# Altium PCB Sensor_Glove-X01.PcbDoc (part 2 of 4)
Units mm, origin at the board's own origin, x right, y up, seen from the top; angles counter-clockwise.
Board outline 58.67 x 37.59 mm, 2 copper layers (Top Layer, Bottom Layer), stack 1.711 mm thick; 126 components, 71 nets, 384 pads, 113 vias.
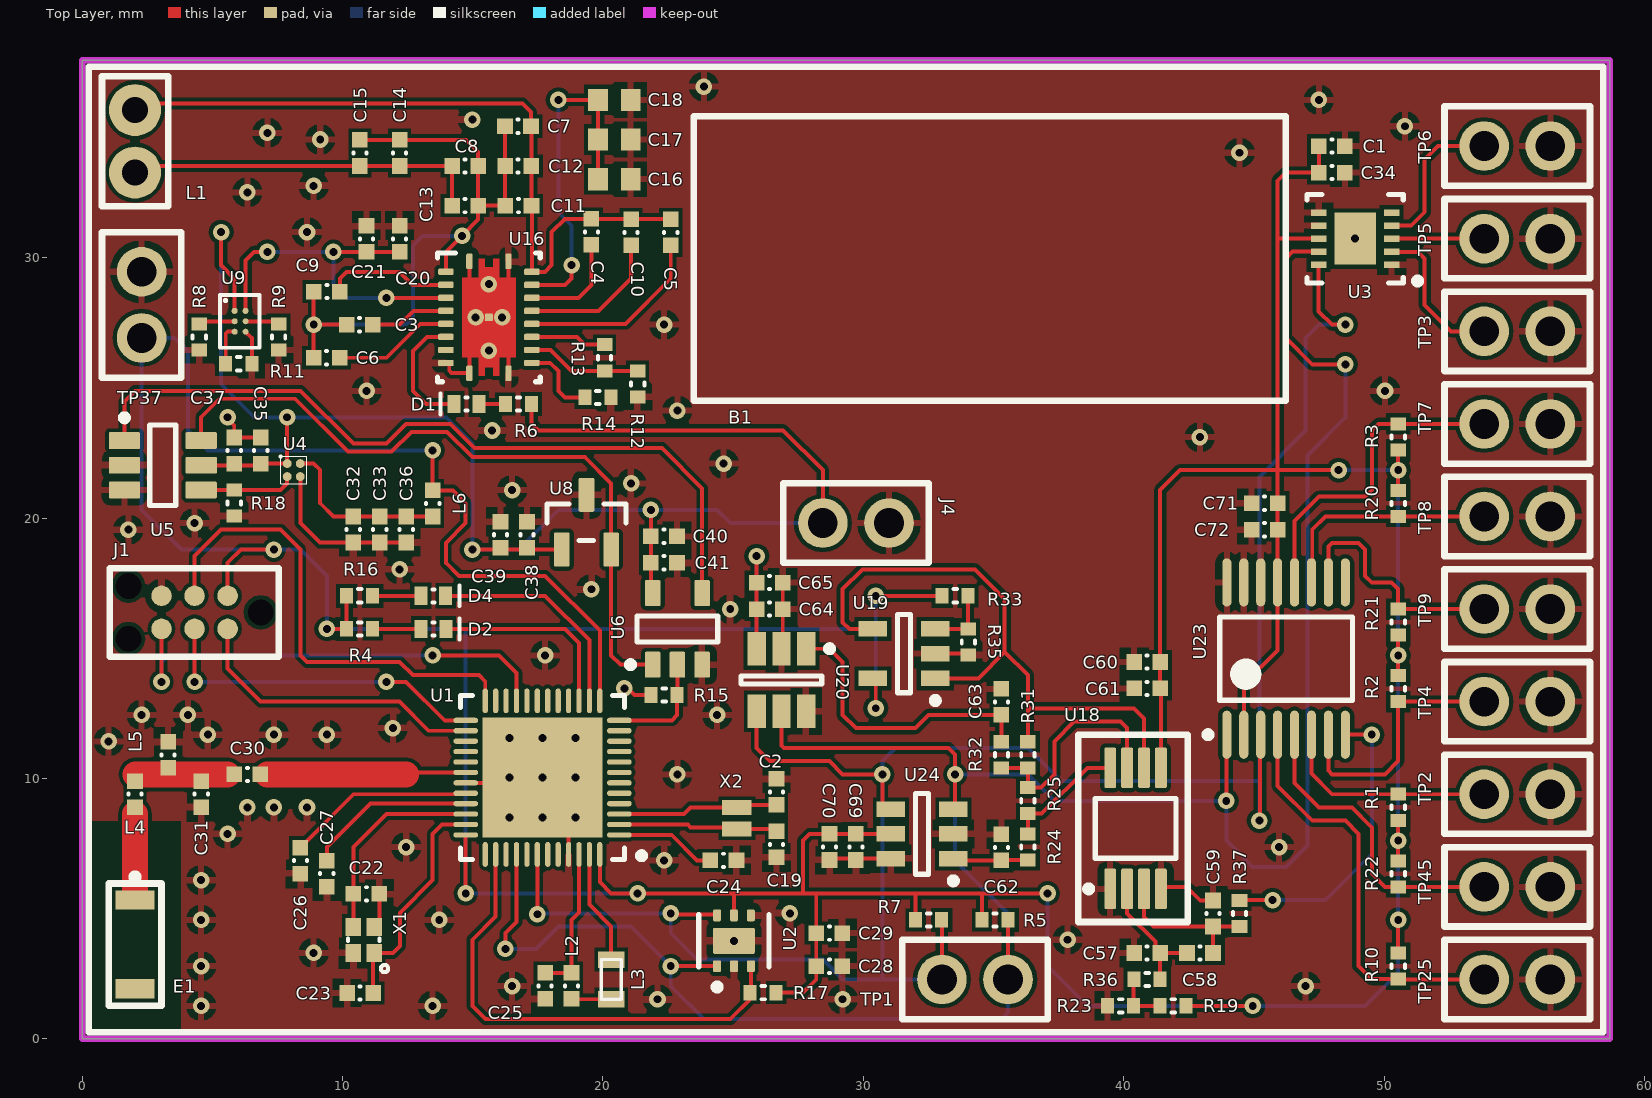
[diagram p0: Top Layer view]

## Part data (continued)
C26 C27: library part C-0402(1005), "Ceramic Capacitor, Multilayer, Ceramic, 50V, 1% +Tol, 1% -Tol, C0G, 30ppm/Cel TC, 0.0001uF, Surface Mount, 0402", Case Code (Imperial)=0402, Case Code (Metric)=1005, Dielectric=C0G, Manufacturer=Yageo, Manufacturer Part Number=CC0402FRNPO9BN101, Max Operating Temperature=125°C, Min Operating Temperature=-55°C, Package Quantity=10000, Supplier Part Number 1=311-3329-1-ND, Tolerance=1%, Voltage Rating=50V, Capacitance=100pF, Case/Package=0402, Category="Ceramic Capacitors", ComponentLink1Description=https://datasheet.ciiva.com/169/product-169683.pdf, ComponentLink1URL=https://datasheet.ciiva.com/169/product-169683.pdf, ComponentLink2Description=https://datasheet.ciiva.com:443/pdfs/VipMasterIC/IC/YAGO/YAGO-S-A0009251638/YAGO-S-A0009251638-1.pdf?src-supplier=IHS+Markit, ComponentLink2URL=https://datasheet.ciiva.com:443/pdfs/VipMasterIC/IC/YAGO/YAGO-S-A0009251638/YAGO-S-A0009251638-1.pdf?src-supplier=IHS+Markit, ComponentLink3Description=http://www.mouser.com/ds/2/447/Yageo_UPY-GP_NP0_16V-to-50V_9-358835.pdf?src-supplier=Mouser, ComponentLink3URL=http://www.mouser.com/ds/2/447/Yageo_UPY-GP_NP0_16V-to-50V_9-358835.pdf?src-supplier=Mouser, ComponentLink4Description=http://components.arrow.com/part/dataview/0323_00775990?src-supplier=Arrow+Europe, ComponentLink4URL=http://components.arrow.com/part/dataview/0323_00775990?src-supplier=Arrow+Europe, ComponentLink5Description=http://www.yageo.com/NewPortal/yageodocoutput?fileName=/pdf/MLCC/UPY-GP_NP0_16V-to-50V_14.pdf&src-supplier=Digi-Key, ComponentLink5URL=http://www.yageo.com/NewPortal/yageodocoutput?fileName=/pdf/MLCC/UPY-GP_NP0_16V-to-50V_14.pdf&src-supplier=Digi-Key, ComponentLink6Description=http://www.yageo.com/documents/recent/UPY-GP_NP0_16V-to-50V_16.pdf?src-supplier=Digi-Key, ComponentLink6URL=http://www.yageo.com/documents/recent/UPY-GP_NP0_16V-to-50V_16.pdf?src-supplier=Digi-Key, ComponentLink7Description=http://www.yageo.com/documents/recent/UPY-GP_NP0_16V-to-50V_9.pdf?src-supplier=Future+Electronics, ComponentLink7URL=http://www.yageo.com/documents/recent/UPY-GP_NP0_16V-to-50V_9.pdf?src-supplier=Future+Electronics, Composition=Ceramic, Depth=0.5mm, Lead Free="Lead Free", Length=1mm, Mount="Surface Mount", Packaging="Tape and Reel", Pricing 1="1=0.11000, 10=0.08200, 100=0.03840, 500=0.02690, 1000=0.02228, 2500=0.02073, 5000=0.01897 (USD)", RoHS=Yes, Stock 1=22812, Supplier 1=Digi-Key, Termination=SMD/SMT, Thickness=0.022inch, Voltage Rating (DC)=50V, Width=0.02inch
C29 C34 C58 C61 C62 C65 C70 C72: library part C-0402(1005), "Ceramic Capacitor, Multilayer, Ceramic, 25V, 10% +Tol, 10% -Tol, X5R, 15% TC, 0.1uF, Surface Mount, 0402", Case Code (Imperial)=0402, Case Code (Metric)=1005, Dielectric=X5R, Manufacturer="Taiyo Yuden", Manufacturer Part Number=TMK105BJ104KV-F, Max Operating Temperature=85°C, Min Operating Temperature=-55°C, Package Quantity=1, Resistor Type=Ceramic, Supplier Part Number 1=587-1456-1-ND, Tolerance=10%, Voltage=25V, Capacitance=100nF, Case/Package=0402, Category="Ceramic Capacitors", ComponentLink1Description=https://datasheet.ciiva.com/169/product-169683.pdf, ComponentLink1URL=https://datasheet.ciiva.com/169/product-169683.pdf, ComponentLink2Description=https://datasheet.ciiva.com:443/pdfs/VipMasterIC/IC/TAIY/TAIY-S-A0009103435/TAIY-S-A0009103038-1.pdf?src-supplier=IHS+Markit, ComponentLink2URL=https://datasheet.ciiva.com:443/pdfs/VipMasterIC/IC/TAIY/TAIY-S-A0009103435/TAIY-S-A0009103038-1.pdf?src-supplier=IHS+Markit, ComponentLink3Description=https://datasheet.ciiva.com/30051/25tmk105bj104kv-f-30051094.pdf?src-supplier=Onlinecomponents.com, ComponentLink3URL=https://datasheet.ciiva.com/30051/25tmk105bj104kv-f-30051094.pdf?src-supplier=Onlinecomponents.com, ComponentLink4Description=https://datasheet.ciiva.com/15922/28tmk105bj104kv-f-15922315.pdf?src-supplier=Onlinecomponents.com, ComponentLink4URL=https://datasheet.ciiva.com/15922/28tmk105bj104kv-f-15922315.pdf?src-supplier=Onlinecomponents.com, ComponentLink5Description=https://datasheet.ciiva.com/131/tmk105bj104kv-f-ss-131420.pdf?src-supplier=Digi-Key, ComponentLink5URL=https://datasheet.ciiva.com/131/tmk105bj104kv-f-ss-131420.pdf?src-supplier=Digi-Key, ComponentLink6Description=https://datasheet.ciiva.com/22768/1693457-22768649.pdf?src-supplier=Farnell, ComponentLink6URL=https://datasheet.ciiva.com/22768/1693457-22768649.pdf?src-supplier=Farnell, Depth=0.5mm, Halogen Free="Halogen Free", Height=0.5mm, Lead Free="Lead Free", Length=1mm, Mount="Surface Mount", Number of Pins=2, Packaging="Tape and Reel", REACH SVHC="No SVHC", RoHS=Yes, Supplier 1=Digi-Key, Termination=SMD/SMT, Thickness=0.022inch, Voltage Rating=25V, Voltage Rating (DC)=25V, Weight=2.3E-05oz, Width=0.5mm
  C29: Pricing 1="1=0.10000, 10=0.04000, 50=0.02180, 100=0.01780, 500=0.01270, 1000=0.00998, 2500=0.00908, 5000=0.00835 (USD)", Stock 1=21430567
  C34 C58 C61 C62 C65 C70 C72: Pricing 1="1=0.10000, 10=0.04400, 50=0.02400, 100=0.01960, 500=0.01398, 1000=0.01098, 2500=0.00998, 5000=0.00918 (USD)", Stock 1=21960903
C30: library part C-0402(1005), "Ceramic Capacitor, Multilayer, Ceramic, 50V, 10% +Tol, 10% -Tol, C0G, 30ppm/Cel TC, 0.0000005uF, Surface Mount, 0402", Case Code (Imperial)=0402, Case Code (Metric)=1005, Dielectric=C0G, Manufacturer=Murata, Manufacturer Part Number=GJM1555C1HR50WB01D, Max Operating Temperature=125°C, Min Operating Temperature=-55°C, Package Quantity=10000, Supplier Part Number 1=490-11250-1-ND, Voltage=50V, Capacitance=0.5pF, Case/Package=0402, Category="Ceramic Capacitors", ComponentLink1Description=https://datasheet.ciiva.com/169/product-169683.pdf, ComponentLink1URL=https://datasheet.ciiva.com/169/product-169683.pdf, ComponentLink2Description=https://datasheet.ciiva.com:443/pdfs/VipMasterIC/IC/MURE/MURE-S-A0004378008/MURE-S-A0004383131-1.pdf?src-supplier=IHS+Markit, ComponentLink2URL=https://datasheet.ciiva.com:443/pdfs/VipMasterIC/IC/MURE/MURE-S-A0004378008/MURE-S-A0004383131-1.pdf?src-supplier=IHS+Markit, ComponentLink3Description=https://datasheet.ciiva.com/169/product-169683.pdf?src-supplier=Digi-Key, ComponentLink3URL=https://datasheet.ciiva.com/169/product-169683.pdf?src-supplier=Digi-Key, Depth=0.5mm, Height=0.5mm, Lead Free="Lead Free", Length=1mm, Mount="Surface Mount", Packaging="Tape and Reel", Pricing 1="1=0.30000, 10=0.20500, 100=0.11610, 500=0.08198, 1000=0.07173, 2500=0.06831, 5000=0.06319 (USD)", Radiation Hardening=No, RoHS=Yes, Stock 1=75988, Supplier 1=Digi-Key, Termination=SMD/SMT, Thickness=0.022inch, Voltage Rating=50V, Voltage Rating (DC)=50V, Width=0.02inch
C31: library part C-0402(1005), "Ceramic Capacitor, Multilayer, Ceramic, 50V, 5% +Tol, 5% -Tol, C0G, 30ppm/Cel TC, 0.000002uF, Surface Mount, 0402", Case Code (Imperial)=0402, Case Code (Metric)=1005, Dielectric=C0G, Manufacturer=Murata, Manufacturer Part Number=GJM1555C1H2R0BB01D, Max Operating Temperature=125°C, Min Operating Temperature=-55°C, Package Quantity=1, Supplier Part Number 1=490-8091-1-ND, Voltage Rating=50V, Capacitance=2pF, Case/Package=0402, Category="Ceramic Capacitors", ComponentLink1Description=https://datasheet.ciiva.com/169/product-169683.pdf, ComponentLink1URL=https://datasheet.ciiva.com/169/product-169683.pdf, ComponentLink2Description=https://datasheet.ciiva.com:443/pdfs/VipMasterIC/IC/MURE/MURE-S-A0008911154/MURE-S-A0008911197-1.pdf?src-supplier=IHS+Markit, ComponentLink2URL=https://datasheet.ciiva.com:443/pdfs/VipMasterIC/IC/MURE/MURE-S-A0008911154/MURE-S-A0008911197-1.pdf?src-supplier=IHS+Markit, ComponentLink3Description=https://datasheet.ciiva.com/5694/1700193-5694978.pdf?src-supplier=Farnell, ComponentLink3URL=https://datasheet.ciiva.com/5694/1700193-5694978.pdf?src-supplier=Farnell, ComponentLink4Description=https://datasheet.ciiva.com/17453/product-17453487.pdf?src-supplier=Avnet+Europe, ComponentLink4URL=https://datasheet.ciiva.com/17453/product-17453487.pdf?src-supplier=Avnet+Europe, ComponentLink5Description=https://datasheet.ciiva.com/16440/l0005e-16440476.pdf?src-supplier=Future+Electronics, ComponentLink5URL=https://datasheet.ciiva.com/16440/l0005e-16440476.pdf?src-supplier=Future+Electronics, Depth=0.5mm, Height=0.5mm, Lead Free="Lead Free", Lead Pitch=0.3mm, Length=1mm, Mount="Surface Mount", Number of Pins=2, Packaging="Tape and Reel", Pricing 1="1=0.19000, 10=0.13000, 100=0.06590, 500=0.04508, 1000=0.03987, 2500=0.03814, 5000=0.03467 (USD)", Radiation Hardening=No, REACH SVHC="No SVHC", RoHS=Yes, Stock 1=969, Supplier 1=Digi-Key, Termination=SMD/SMT, Thickness=0.022inch, Voltage Rating (DC)=50V, Width=0.5mm
C57 C59: library part C-0402(1005), "___ OHM ___ mW 0402(1005) SMD", ComponentLink1Description=https://datasheet.ciiva.com/169/product-169683.pdf, ComponentLink1URL=https://datasheet.ciiva.com/169/product-169683.pdf
D1: library part LED_0402(1005), "Single Color LED, Super Bright Yellow, Water Clear, 0.8mm", Case Code (Imperial)=0402, Case Code (Metric)=1005, Forward Current=20mA, Forward Voltage=2V, Lens Color=Clear, Manufacturer=Kingbright, Manufacturer Part Number=APHHS1005SYCK, Max Operating Temperature=85°C, Min Operating Temperature=-40°C, Package Quantity=2000, Supplier Part Number 1=754-1105-1-ND, Case/Package=0402, Category=LEDs, Color=Yellow, ComponentLink1Description=https://datasheet.ciiva.com:443/pdfs/VipMasterIC/IC/KBEC/KBEC-S-A0008947180/KBEC-S-A0008958019-1.pdf?src-supplier=IHS+Markit, ComponentLink1URL=https://datasheet.ciiva.com:443/pdfs/VipMasterIC/IC/KBEC/KBEC-S-A0008947180/KBEC-S-A0008958019-1.pdf?src-supplier=IHS+Markit, ComponentLink2Description=https://datasheet.ciiva.com/4688/aphhs1005syck-76875-4688936.pdf?src-supplier=Mouser, ComponentLink2URL=https://datasheet.ciiva.com/4688/aphhs1005syck-76875-4688936.pdf?src-supplier=Mouser, ComponentLink3Description=https://datasheet.ciiva.com/2114/aphhs1005syck-2114041.pdf?src-supplier=Digi-Key, ComponentLink3URL=https://datasheet.ciiva.com/2114/aphhs1005syck-2114041.pdf?src-supplier=Digi-Key, ComponentLink4Description=https://datasheet.ciiva.com/14603/70062834-14603866.pdf?src-supplier=Allied+Electronics, ComponentLink4URL=https://datasheet.ciiva.com/14603/70062834-14603866.pdf?src-supplier=Allied+Electronics, ComponentLink5Description=https://datasheet.ciiva.com/2114/aphhs1005syck-2114043.pdf?src-supplier=Digi-Key, ComponentLink5URL=https://datasheet.ciiva.com/2114/aphhs1005syck-2114043.pdf?src-supplier=Digi-Key, ComponentLink6Description=https://datasheet.ciiva.com/16412/aphhs1005syck-16412188.pdf?src-supplier=Future+Electronics, ComponentLink6URL=https://datasheet.ciiva.com/16412/aphhs1005syck-16412188.pdf?src-supplier=Future+Electronics, Dominant Wavelength=590nm, Height=0.6mm, Illumination Color=Yellow, Lead Free="Lead Free", Length=1mm, Lens Style=Clear,Flat, Luminous Intensity=150mcd, Mount="Surface Mount", Number of LEDs=1, Number of Pins=2, Packaging="Tape and Reel", Pricing 1="1=0.44000, 10=0.31200, 100=0.18200, 500=0.12480, 1000=0.10400 (USD)", RoHS=Yes, Stock 1=1790, Supplier 1=Digi-Key, Test Current=20mA, Viewing Angle=120°, Width=0.5mm
D2: library part LED_0402(1005), "Single Color LED, Super Bright Orange, Water Clear, 0.8mm", Case Code (Imperial)=0402, Case Code (Metric)=1005, Forward Current=20mA, Forward Voltage=2.1V, Lens Color=Clear, Manufacturer=Kingbright, Manufacturer Part Number=APHHS1005SECK, Max Operating Temperature=85°C, Min Operating Temperature=-40°C, Package Quantity=2000, Supplier Part Number 1=754-1103-1-ND, Case/Package=0402, Category=LEDs, Color=Orange, ComponentLink1Description=https://datasheet.ciiva.com:443/pdfs/VipMasterIC/IC/KNGB/KNGBS06640/KNGBS06640-1.pdf?src-supplier=IHS+Markit, ComponentLink1URL=https://datasheet.ciiva.com:443/pdfs/VipMasterIC/IC/KNGB/KNGBS06640/KNGBS06640-1.pdf?src-supplier=IHS+Markit, ComponentLink2Description=https://datasheet.ciiva.com/2114/aphhs1005seck-2114149.pdf?src-supplier=Digi-Key, ComponentLink2URL=https://datasheet.ciiva.com/2114/aphhs1005seck-2114149.pdf?src-supplier=Digi-Key, ComponentLink3Description=https://datasheet.ciiva.com/4688/aphhs1005seck-36485-4688716.pdf?src-supplier=Mouser, ComponentLink3URL=https://datasheet.ciiva.com/4688/aphhs1005seck-36485-4688716.pdf?src-supplier=Mouser, ComponentLink4Description=https://datasheet.ciiva.com/2114/aphhs1005seck-2114150.pdf?src-supplier=Digi-Key, ComponentLink4URL=https://datasheet.ciiva.com/2114/aphhs1005seck-2114150.pdf?src-supplier=Digi-Key, ComponentLink5Description=https://datasheet.ciiva.com/2114/aphhs1005seck-2114151.pdf?src-supplier=Digi-Key, ComponentLink5URL=https://datasheet.ciiva.com/2114/aphhs1005seck-2114151.pdf?src-supplier=Digi-Key, ComponentLink6Description=https://datasheet.ciiva.com/16412/aphhs1005seck-16412186.pdf?src-supplier=Future+Electronics, ComponentLink6URL=https://datasheet.ciiva.com/16412/aphhs1005seck-16412186.pdf?src-supplier=Future+Electronics, Dominant Wavelength=601nm, Height=0.6mm, Illumination Color=Orange, Lead Free="Lead Free", Length=1mm, Lens Style=Clear,Flat, Luminous Intensity=240mcd, Mount="Surface Mount", Number of LEDs=1, Number of Pins=2, Packaging="Tape and Reel", Pricing 1="1=0.50000, 10=0.35400, 100=0.20650, 500=0.14160, 1000=0.11800 (USD)", RoHS=Yes, Stock 1=18062, Supplier 1=Digi-Key, Test Current=20mA, Viewing Angle=120°, Wavelength=601nm, Width=0.5mm
D4: library part LED_0402(1005), "Single Color LED, Hyper Red, Water Clear, 0.8mm", Case Code (Imperial)=0402, Case Code (Metric)=1005, Forward Current=20mA, Forward Voltage=1.95V, Lens Color=Clear, Manufacturer=Kingbright, Manufacturer Part Number=APHHS1005SURCK, Max Operating Temperature=85°C, Min Operating Temperature=-40°C, Package Quantity=2000, Supplier Part Number 1=754-1104-1-ND, Case/Package=0402, Category=LEDs, Color=Red, ComponentLink1Description=https://datasheet.ciiva.com:443/pdfs/VipMasterIC/IC/KBEC/KBEC-S-A0008947180/KBEC-S-A0008958151-1.pdf?src-supplier=IHS+Markit, ComponentLink1URL=https://datasheet.ciiva.com:443/pdfs/VipMasterIC/IC/KBEC/KBEC-S-A0008947180/KBEC-S-A0008958151-1.pdf?src-supplier=IHS+Markit, ComponentLink2Description=https://datasheet.ciiva.com/4689/aphhs1005surck-32322-4689068.pdf?src-supplier=Mouser, ComponentLink2URL=https://datasheet.ciiva.com/4689/aphhs1005surck-32322-4689068.pdf?src-supplier=Mouser, ComponentLink3Description=https://datasheet.ciiva.com/2114/aphhs1005surck-2114140.pdf?src-supplier=Digi-Key, ComponentLink3URL=https://datasheet.ciiva.com/2114/aphhs1005surck-2114140.pdf?src-supplier=Digi-Key, ComponentLink4Description=https://datasheet.ciiva.com/14603/70062833-14603899.pdf?src-supplier=Allied+Electronics, ComponentLink4URL=https://datasheet.ciiva.com/14603/70062833-14603899.pdf?src-supplier=Allied+Electronics, ComponentLink5Description=https://datasheet.ciiva.com/2114/aphhs1005surck-2114142.pdf?src-supplier=Digi-Key, ComponentLink5URL=https://datasheet.ciiva.com/2114/aphhs1005surck-2114142.pdf?src-supplier=Digi-Key, ComponentLink6Description=https://datasheet.ciiva.com/2114/aphhs1005surck-2114141.pdf?src-supplier=Digi-Key, ComponentLink6URL=https://datasheet.ciiva.com/2114/aphhs1005surck-2114141.pdf?src-supplier=Digi-Key, Dominant Wavelength=630nm, Height=0.6mm, Illumination Color=Red, Lead Free="Lead Free", Length=1mm, Lens Style=Clear,Flat, Luminous Intensity=220mcd, Mount="Surface Mount", Number of LEDs=1, Number of Pins=2, Packaging="Tape and Reel", Pricing 1="1=0.50000, 10=0.35400, 100=0.20650, 500=0.14160, 1000=0.11800 (USD)", RoHS=Yes, Stock 1=12156, Supplier 1=Digi-Key, Test Current=20mA, Viewing Angle=120°, Wavelength=635nm, Width=0.5mm
E1: "2.4 GHz BLE Antenna", Case/Package=CSMD, Frequency=2.45GHz, Manufacturer=Johanson, Manufacturer Part Number=2450AT18B100E, Max Frequency=2.5GHz, Max Power Dissipation=3W, Package Quantity=1, Supplier Part Number 1=712-1006-1-ND, Bandwidth=100MHz, ComponentLink1Description=https://datasheet.ciiva.com/1124/1318299-1124918.pdf, ComponentLink1URL=https://datasheet.ciiva.com/1124/1318299-1124918.pdf, ComponentLink2Description=https://datasheet.ciiva.com/24025/antenna-2450at18b100-242422-24025839.pdf, ComponentLink2URL=https://datasheet.ciiva.com/24025/antenna-2450at18b100-242422-24025839.pdf, Contact Plating=Tin, Description 1="JOHANSON TECHNOLOGY         2450AT18B100E             ANTENNA, CERAMIC, 2.45GHZ", Gain=-0.5dB, Height=0.051inch, Impedance=50R, Length=3.2mm, Mount="Surface Mount", Number of Bands=1, Packaging="Tape and Reel", Power Rating=3W, Pricing 1="1=0.62, 10=0.541, 25=0.4788, 100=0.4172, 250=0.3631, 500=0.309, 1000=0.2472 (USD)", REACH SVHC="No SVHC", Return Loss=-9.5dB, Stock 1=187598, Supplier 1=Digi-Key, Termination=Solder, Width=1.6mm
J1: library part "J-Link 6 pin needle", Manufacturer=Segger, Manufacturer Part Number="8.06.16 J-LINK 6-PIN NEEDLE ADAPTER", Supplier Part Number 1=899-1051-ND, Pricing 1="1=104.13000 (USD)", RoHS=No, Stock 1=177, Supplier 1=Digi-Key
J4: library part JUMPER_BATTERY, "Lithium Battery 3.7V 40mAh Rechargeable", Capacity=40mAh, Manufacturer=SparkFun, Manufacturer Part Number=PRT-13852, Supplier Part Number 1=1568-1496-ND, Voltage Rating=3.7V, ComponentLink1Description=http://cdn.sparkfun.com/datasheets/Prototyping/SPE-00-301120-40mah-en-1.0ver.pdf?src-supplier=Digi-Key, ComponentLink1URL=http://cdn.sparkfun.com/datasheets/Prototyping/SPE-00-301120-40mah-en-1.0ver.pdf?src-supplier=Digi-Key, Pricing 1="1=4.50000 (USD)", RoHS=No, Stock 1=237, Supplier 1=Digi-Key, Termination=Connector, Weight=5g
L1: library part WIRELESS_CHARGING_COIL, "General Purpose Inductor, 11.8uH, 10%, 1 Element", Current Rating=700mA, DC Resistance (DCR)=750mR, Inductance=11.8uH, Inductance Tolerance=10%, Manufacturer="Wurth Electronics", Manufacturer Part Number=760308101219, Max Operating Temperature=105°C, Min Operating Temperature=-20°C, Saturation Current=1.5A, Self Resonant Frequency=22MHz, Supplier Part Number 1=732-9675-ND, ComponentLink1Description=https://datasheet.ciiva.com:443/pdfs/VipMasterIC/IC/MIDC/MIDC-S-A0003386501/MIDC-S-A0003386501-1.pdf?src-supplier=IHS+Markit, ComponentLink1URL=https://datasheet.ciiva.com:443/pdfs/VipMasterIC/IC/MIDC/MIDC-S-A0003386501/MIDC-S-A0003386501-1.pdf?src-supplier=IHS+Markit, ComponentLink2Description=http://www.farnell.com/datasheets/2039993.pdf?src-supplier=Farnell, ComponentLink2URL=http://www.farnell.com/datasheets/2039993.pdf?src-supplier=Farnell, ComponentLink3Description=http://www.farnell.com/datasheets/2039993.pdf?src-supplier=Element14, ComponentLink3URL=http://www.farnell.com/datasheets/2039993.pdf?src-supplier=Element14, Height=0.02inch, Logic Function=Receiver, Pricing 1="1=7.43000, 10=7.04000, 32=6.49000, 64=5.94000, 128=5.17000 (USD)", REACH SVHC=Unknown, RoHS=Yes, Stock 1=168, Supplier 1=Digi-Key, Tolerance=10%
L2: library part I-0402(1005), "General Purpose Inductor, 0.015uH, 5%, 1 Element, Ferrite-Core, SMD, 0402", Case Code (Imperial)=0402, Case Code (Metric)=1005, Current Rating=320mA, DC Resistance (DCR)=460mR, Inductance Tolerance=5%, Manufacturer="Taiyo Yuden", Manufacturer Part Number=HK100515NJ-T, Max DC Current=300mA, Max Operating Temperature=125°C, Min Operating Temperature=-55°C, Package Quantity=10000, Self Resonant Frequency=2.3GHz, Supplier Part Number 1=587-1521-1-ND, Test Frequency=100MHz, Body Material=Ceramic, Case/Package=0402, Category="Fixed Inductors", ComponentLink1Description=https://datasheet.ciiva.com:443/pdfs/VipMasterIC/IC/TAIY/TAIY-S-A0009098652/TAIY-S-A0009098648-1.pdf?src-supplier=IHS+Markit, ComponentLink1URL=https://datasheet.ciiva.com:443/pdfs/VipMasterIC/IC/TAIY/TAIY-S-A0009098652/TAIY-S-A0009098648-1.pdf?src-supplier=IHS+Markit, ComponentLink2Description=https://datasheet.ciiva.com/6688/hk100515nj-t-ss-6688640.pdf?src-supplier=Digi-Key, ComponentLink2URL=https://datasheet.ciiva.com/6688/hk100515nj-t-ss-6688640.pdf?src-supplier=Digi-Key, ComponentLink3Description=https://datasheet.ciiva.com/8498/hk100515nj-t-ss-8498917.pdf?src-supplier=Avnet, ComponentLink3URL=https://datasheet.ciiva.com/8498/hk100515nj-t-ss-8498917.pdf?src-supplier=Avnet, ComponentLink4Description=https://datasheet.ciiva.com/26871/getdatasheetpartid-645793-26871605.pdf?src-supplier=Verical, ComponentLink4URL=https://datasheet.ciiva.com/26871/getdatasheetpartid-645793-26871605.pdf?src-supplier=Verical, ComponentLink5Description=https://datasheet.ciiva.com/15986/1443hk100515nj-t-15986294.pdf?src-supplier=Onlinecomponents.com, ComponentLink5URL=https://datasheet.ciiva.com/15986/1443hk100515nj-t-15986294.pdf?src-supplier=Onlinecomponents.com, ComponentLink6Description=https://datasheet.ciiva.com/30215/1387hk100515nj-t-30215366.pdf?src-supplier=Onlinecomponents.com, ComponentLink6URL=https://datasheet.ciiva.com/30215/1387hk100515nj-t-30215366.pdf?src-supplier=Onlinecomponents.com, Core Material=Ferrite,Ceramic, DC Current=320mA, Depth=0.55mm, Halogen Free="Halogen Free", Height=0.5mm, Height - Seated (Max)=0.022inch, Inductance=15nH, Lead Free=Exempt, Length=1.05mm, Military Standard=Not, Mount="Surface Mount", Number of Pins=2, Packaging="Tape and Reel", Pricing 1="1=0.10000, 10=0.02900, 100=0.01960, 500=0.01582, 1000=0.01351, 2500=0.01208 (USD)", Q Factor=8, Radiation Hardening=No, REACH SVHC=Unknown, RoHS=Yes, Shielding=Unshielded, Stock 1=127125, Supplier 1=Digi-Key, Termination=SMD/SMT, Tolerance=5%, Width=0.02inch
L3: library part I-0603(1608), "General Purpose Inductor, 10uH, 10%, 1 Element, Ferrite-Core, SMD, 0603", Case Code (Imperial)=0603, Case Code (Metric)=1608, Current Rating=380mA, DC Resistance (DCR)=468mR, Inductance Tolerance=10%, Manufacturer="Taiyo Yuden", Manufacturer Part Number=CBMF1608T100K, Max Operating Temperature=105°C, Min Operating Temperature=-40°C, Package Quantity=3000, Saturation Current=115mA, Self Resonant Frequency=32MHz, Supplier Part Number 1=587-1720-1-ND, Test Frequency=2.52MHz, Case/Package=0603, Category="Fixed Inductors", ComponentLink1Description=https://datasheet.ciiva.com:443/pdfs/VipMasterIC/IC/TAIY/TAIY-S-A0009098652/TAIY-S-A0009097792-1.pdf?src-supplier=IHS+Markit, ComponentLink1URL=https://datasheet.ciiva.com:443/pdfs/VipMasterIC/IC/TAIY/TAIY-S-A0009098652/TAIY-S-A0009097792-1.pdf?src-supplier=IHS+Markit, ComponentLink2Description=https://datasheet.ciiva.com/1040/cbmf1608t100k-ss-1040608.pdf?src-supplier=Digi-Key, ComponentLink2URL=https://datasheet.ciiva.com/1040/cbmf1608t100k-ss-1040608.pdf?src-supplier=Digi-Key, ComponentLink3Description=https://datasheet.ciiva.com/26871/getdatasheetpartid-638595-26871191.pdf?src-supplier=Verical, ComponentLink3URL=https://datasheet.ciiva.com/26871/getdatasheetpartid-638595-26871191.pdf?src-supplier=Verical, ComponentLink4Description=https://datasheet.ciiva.com/15981/521cbmf1608t100k-15981672.pdf?src-supplier=Onlinecomponents.com, ComponentLink4URL=https://datasheet.ciiva.com/15981/521cbmf1608t100k-15981672.pdf?src-supplier=Onlinecomponents.com, ComponentLink5Description=https://datasheet.ciiva.com/46395/1521599-46395181.pdf?src-supplier=Element14, ComponentLink5URL=https://datasheet.ciiva.com/46395/1521599-46395181.pdf?src-supplier=Element14, Composition=Wirewound, Core Material=Ferrite, DC Current=380mA, Depth=1mm, Halogen Free="Halogen Free", Height=0.8mm, Height - Seated (Max)=0.039inch, Inductance=10uH, Lead Free="Lead Free", Length=0.063inch, Max DC Current=380mA, Military Standard=Not, Mount="Surface Mount", Packaging="Tape and Reel", Pricing 1="1=0.27000, 10=0.23900, 100=0.16450, 500=0.14054, 1000=0.10764 (USD)", Radiation Hardening=No, REACH SVHC=Unknown, RoHS=Yes, Shielding=Unshielded, Stock 1=148191, Supplier 1=Digi-Key, Termination=SMD/SMT, Tolerance=10%, Width=0.031inch
L4: library part I-0402(1005), "General Purpose Inductor, 0.009uH, 2%, 1 Element, SMD", Case/Package=0402, Current Rating=1.42A, DC Resistance (DCR)=70mR, Manufacturer=Murata, Manufacturer Part Number=LQW15AN9N0G80D, Max Operating Temperature=125°C, Min Operating Temperature=-55°C, Self Resonant Frequency=6.5GHz, Supplier Part Number 1=490-14715-1-ND, Test Frequency=100MHz, Tolerance=2%, Category="Fixed Inductors", ComponentLink1Description=https://datasheet.ciiva.com:443/pdfs/VipMasterIC/IC/MURE/MURE-S-A0004390746/MURE-S-A0004390720-1.pdf?src-supplier=IHS+Markit, ComponentLink1URL=https://datasheet.ciiva.com:443/pdfs/VipMasterIC/IC/MURE/MURE-S-A0004390746/MURE-S-A0004390720-1.pdf?src-supplier=IHS+Markit, ComponentLink2Description=https://search.murata.co.jp/Ceramy/image/img/P02/partnumbering_LQ3E.pdf?src-supplier=Digi-Key, ComponentLink2URL=https://search.murata.co.jp/Ceramy/image/img/P02/partnumbering_LQ3E.pdf?src-supplier=Digi-Key, ComponentLink3Description=https://search.murata.co.jp/Ceramy/image/img/P02/JELF243A-0100.pdf?src-supplier=Digi-Key, ComponentLink3URL=https://search.murata.co.jp/Ceramy/image/img/P02/JELF243A-0100.pdf?src-supplier=Digi-Key, Composition=Wirewound, Height - Seated (Max)=0.024inch, Inductance=9nH, Length=0.039inch, Mount="Surface Mount", Packaging="Tape and Reel", Pricing 1="1=0.25000, 10=0.22100, 100=0.15180, 500=0.12972, 1000=0.09936, 2500=0.09384 (USD)", RoHS=Yes, Shielding=Unshielded, Stock 1=10351, Supplier 1=Digi-Key, Width=0.024inch
L5: library part I-0402(1005), "General Purpose Inductor, 0.002uH, 5%, 1 Element, Ceramic-Core, SMD, 0402", Case Code (Imperial)=0402, Case Code (Metric)=1005, Current Rating=1.04A, DC Resistance (DCR)=70mR, Manufacturer=Abracon, Manufacturer Part Number=AISC-0402-2N0J-T, Max Operating Temperature=125°C, Min Operating Temperature=-40°C, Package Quantity=10000, Self Resonant Frequency=11.1GHz, Supplier Part Number 1=535-10424-1-ND, Test Frequency=250MHz, Tolerance=5%, Case/Package=0402, Category=Inductors, ComponentLink1Description=https://datasheet.ciiva.com:443/pdfs/VipMasterIC/IC/ABRC/ABRC-S-A0009700385/ABRC-S-A0009751294-1.pdf?src-supplier=IHS+Markit, ComponentLink1URL=https://datasheet.ciiva.com:443/pdfs/VipMasterIC/IC/ABRC/ABRC-S-A0009700385/ABRC-S-A0009751294-1.pdf?src-supplier=IHS+Markit, ComponentLink2Description=https://datasheet.ciiva.com/26928/getdatasheetpartid-762366-26928064.pdf?src-supplier=Verical, ComponentLink2URL=https://datasheet.ciiva.com/26928/getdatasheetpartid-762366-26928064.pdf?src-supplier=Verical, ComponentLink3Description=https://datasheet.ciiva.com/11140/aisc-0402-11140262.pdf?src-supplier=Avnet, ComponentLink3URL=https://datasheet.ciiva.com/11140/aisc-0402-11140262.pdf?src-supplier=Avnet, ComponentLink4Description=https://datasheet.ciiva.com/1054/aisc-0402-1054030.pdf?src-supplier=Digi-Key, ComponentLink4URL=https://datasheet.ciiva.com/1054/aisc-0402-1054030.pdf?src-supplier=Digi-Key, ComponentLink5Description=https://datasheet.ciiva.com/1054/aisc-0402-1054031.pdf?src-supplier=Digi-Key, ComponentLink5URL=https://datasheet.ciiva.com/1054/aisc-0402-1054031.pdf?src-supplier=Digi-Key, ComponentLink6Description=https://datasheet.ciiva.com/1054/aisc-0402-1054032.pdf?src-supplier=Digi-Key, ComponentLink6URL=https://datasheet.ciiva.com/1054/aisc-0402-1054032.pdf?src-supplier=Digi-Key, Composition=Wirewound,Ceramic, Core Material=Ceramic, DC Current=1.04A, Depth=0.64mm, Height=0.66mm, Height - Seated (Max)=0.026inch, Inductance=2nH, Length=1.19mm, Max DC Current=1.04A, Military Standard=Not, Mount="Surface Mount", Number of Pins=2, Packaging="Tape and Reel", Pricing 1="1=0.34000, 10=0.30400, 100=0.20870, 500=0.17836, 1000=0.13662, 2500=0.12903 (USD)", Q Factor=16, Radiation Hardening=No, RoHS=Yes, Shielding=Unshielded, Stock 1=4311, Supplier 1=Digi-Key, Termination=SMD/SMT, Width=0.025inch
L6: library part "Inductor Iron", "General Purpose Inductor, 1uH, 20%, 1 Element, Ferrite-Core, SMD, 0402", Case Code (Imperial)=0402, Case Code (Metric)=1005, Current Rating=450mA, DC Resistance (DCR)=455mR, Manufacturer=TDK, Manufacturer Part Number=MLZ1005M1R0WT000, Max Operating Temperature=125°C, Min Operating Temperature=-55°C, Package Quantity=10000, Saturation Current=100mA, Self Resonant Frequency=170MHz, Supplier Part Number 1=445-6379-1-ND, Test Frequency=2MHz, Tolerance=20%, Case/Package=0402, Category="Fixed Inductors", ComponentLink1Description=https://datasheet.ciiva.com:443/pdfs/VipMasterIC/IC/TDKC/TDKC-S-A0006811779/TDKC-S-A0006811779-1.pdf?src-supplier=IHS+Markit, ComponentLink1URL=https://datasheet.ciiva.com:443/pdfs/VipMasterIC/IC/TDKC/TDKC-S-A0006811779/TDKC-S-A0006811779-1.pdf?src-supplier=IHS+Markit, ComponentLink2Description=https://datasheet.ciiva.com/29699/inductor-commercial-decoupling-mlz-en-29699052.pdf?src-supplier=Digi-Key, ComponentLink2URL=https://datasheet.ciiva.com/29699/inductor-commercial-decoupling-mlz-en-29699052.pdf?src-supplier=Digi-Key, ComponentLink3Description=https://datasheet.ciiva.com/29699/inductor-commercial-decoupling-mlz-en-29699053.pdf?src-supplier=Digi-Key, ComponentLink3URL=https://datasheet.ciiva.com/29699/inductor-commercial-decoupling-mlz-en-29699053.pdf?src-supplier=Digi-Key, Core Material=Ferrite, Height - Seated (Max)=0.022inch, Inductance=1uH, Length=0.039inch, Mount="Surface Mount", Packaging="Tape and Reel", Pricing 1="1=0.29000, 10=0.25800, 100=0.17710, 500=0.15134, 1000=0.11592, 2500=0.10948 (USD)", RoHS=Yes, Shielding=Shielded, Supplier 1=Digi-Key, Width=0.02inch
R1 R2 R3 R10 R19 R20 R21 R22 R23 R25 R31: library part R-0402(1005), "___ OHM ___ mW 0402(1005) SMD"
R4 R16: library part R-0402(1005), "Fixed Resistor, Thin Film, 0.0625W, 422ohm, 50V, 0.1% +/-Tol, 25ppm/Cel, Surface Mount, 0402", Case Code (Imperial)=0402, Case Code (Metric)=1005, Manufacturer=Yageo, Manufacturer Part Number=RT0402BRD07422RL, Max Operating Temperature=125°C, Min Operating Temperature=-55°C, Power Rating=62.5mW, Supplier Part Number 1=YAG4263CT-ND, Temperature Coefficient=25ppm/°C, Tolerance=0.1%, Voltage Rating=50V, Case/Package=0402, Category="Chip SMD Resistors", ComponentLink1Description=https://datasheet.ciiva.com:443/pdfs/VipMasterIC/IC/YAGO/YAGO-S-A0008510989/YAGO-S-A0008510989-1.pdf?src-supplier=IHS+Markit, ComponentLink1URL=https://datasheet.ciiva.com:443/pdfs/VipMasterIC/IC/YAGO/YAGO-S-A0008510989/YAGO-S-A0008510989-1.pdf?src-supplier=IHS+Markit, ComponentLink2Description=https://datasheet.ciiva.com/12705/pyu-rt-1-to-0-05-rohs-l-4-12705867.pdf?src-supplier=Mouser, ComponentLink2URL=https://datasheet.ciiva.com/12705/pyu-rt-1-to-0-05-rohs-l-4-12705867.pdf?src-supplier=Mouser, Height=350um, Lead Free="Lead Free", Length=1mm, Packaging="Tape and Reel", Pricing 1="1=0.39000, 10=0.27800, 100=0.11140, 1000=0.05488, 2500=0.05084, 5000=0.04600 (USD)", Resistance=422R, RoHS=Yes, Stock 1=9302, Supplier 1=Digi-Key, Termination=SMD/SMT, Voltage Rating (DC)=50V, Width=500um
R5 R7 R9 R17: library part R-0402(1005), "Fixed Resistor, Metal Glaze/thick Film, 0.0625W, 3300ohm, 50V, 1% +/-Tol, 100ppm/Cel, Surface Mount, 0402", Case Code (Imperial)=0402, Case Code (Metric)=1005, Manufacturer=Yageo, Manufacturer Part Number=AC0402FR-073K3L, Max Operating Temperature=155°C, Max Power Dissipation=63mW, Min Operating Temperature=-55°C, Power Rating=62.5mW, Supplier Part Number 1=YAG3483CT-ND, Temperature Coefficient=100ppm/°C, Tolerance=1%, Voltage Rating=50V, Case/Package=0402, Category="Chip SMD Resistors", ComponentLink1Description=https://datasheet.ciiva.com:443/pdfs/VipMasterIC/IC/YAGO/YAGO-S-A0003597364/YAGO-S-A0003597364-1.pdf?src-supplier=IHS+Markit, ComponentLink1URL=https://datasheet.ciiva.com:443/pdfs/VipMasterIC/IC/YAGO/YAGO-S-A0003597364/YAGO-S-A0003597364-1.pdf?src-supplier=IHS+Markit, ComponentLink2Description=http://www.mouser.com/ds/2/447/yageodocoutput-1111992.pdf?src-supplier=Mouser, ComponentLink2URL=http://www.mouser.com/ds/2/447/yageodocoutput-1111992.pdf?src-supplier=Mouser, ComponentLink3Description=http://www.yageo.com/NewPortal/yageodocoutput?fileName=/pdf/R-Chip/PYu-AC_51_RoHS_L_6.pdf&src-supplier=Digi-Key, ComponentLink3URL=http://www.yageo.com/NewPortal/yageodocoutput?fileName=/pdf/R-Chip/PYu-AC_51_RoHS_L_6.pdf&src-supplier=Digi-Key, ComponentLink4Description=http://www.yageo.com/documents/recent/PYu-AC_51_RoHS_L_2_revised.pdf?src-supplier=Future+Electronics, ComponentLink4URL=http://www.yageo.com/documents/recent/PYu-AC_51_RoHS_L_2_revised.pdf?src-supplier=Future+Electronics, Composition="Thick Film", Features="Moisture Resistant,Automotive AEC-Q200", Height=0.015inch, Lead Free="Lead Free", Length=0.039inch, Number of Terminations=2, Packaging="Tape and Reel", Pricing 1="1=0.10000, 10=0.02100, 100=0.00870, 1000=0.00390, 2500=0.00338, 5000=0.00279 (USD)", Resistance=3.3kR, RoHS=Yes, Supplier 1=Digi-Key, Termination=SMD/SMT, Width=0.02inch
R6: library part R-0402(1005), "Fixed Resistor, Metal Glaze/thick Film, 0.0625W, 464ohm, 50V, 1% +/-Tol, 100ppm/Cel, Surface Mount, 0402", Case Code (Imperial)=0402, Case Code (Metric)=1005, Manufacturer=Yageo, Manufacturer Part Number=RC0402FR-07464RL, Max Operating Temperature=155°C, Max Power Dissipation=63mW, Min Operating Temperature=-55°C, Package Quantity=1, Power Rating=62.5mW, Supplier Part Number 1=311-464LRCT-ND, Temperature Coefficient=100ppm/°C, Tolerance=1%, Voltage Rating=50V, Case/Package=0402, Category="Chip SMD Resistors", ComponentLink1Description=https://datasheet.ciiva.com:443/pdfs/VipMasterIC/IC/YAGO/YAGO-S-A0008145938/YAGO-S-A0008145938-1.pdf?src-supplier=IHS+Markit, ComponentLink1URL=https://datasheet.ciiva.com:443/pdfs/VipMasterIC/IC/YAGO/YAGO-S-A0008145938/YAGO-S-A0008145938-1.pdf?src-supplier=IHS+Markit, ComponentLink2Description=https://datasheet.ciiva.com/2519/pyu-r-int-thick-7-2519093.pdf?src-supplier=Digi-Key, ComponentLink2URL=https://datasheet.ciiva.com/2519/pyu-r-int-thick-7-2519093.pdf?src-supplier=Digi-Key, ComponentLink3Description=https://datasheet.ciiva.com/2519/pyu-r-int-thick-7-2519094.pdf?src-supplier=Digi-Key, ComponentLink3URL=https://datasheet.ciiva.com/2519/pyu-r-int-thick-7-2519094.pdf?src-supplier=Digi-Key, ComponentLink4Description=https://datasheet.ciiva.com/2519/pyu-r-int-thick-7-2519095.pdf?src-supplier=Digi-Key, ComponentLink4URL=https://datasheet.ciiva.com/2519/pyu-r-int-thick-7-2519095.pdf?src-supplier=Digi-Key, ComponentLink5Description=https://datasheet.ciiva.com/17052/pyu-rc0402-51-rohs-l-6-r-17052231.pdf?src-supplier=Future+Electronics, ComponentLink5URL=https://datasheet.ciiva.com/17052/pyu-rc0402-51-rohs-l-6-r-17052231.pdf?src-supplier=Future+Electronics, ComponentLink6Description=https://datasheet.ciiva.com/8885/pyu-rc0402-51-rohs-l-6-8885608.pdf?src-supplier=Avnet, ComponentLink6URL=https://datasheet.ciiva.com/8885/pyu-rc0402-51-rohs-l-6-8885608.pdf?src-supplier=Avnet, ComponentLink7Description=https://datasheet.ciiva.com/12577/pyu-rc0402-51-rohs-l-6-r-12577387.pdf?src-supplier=Mouser, ComponentLink7URL=https://datasheet.ciiva.com/12577/pyu-rc0402-51-rohs-l-6-r-12577387.pdf?src-supplier=Mouser, Composition="Thick Film", Contact Plating=Tin,Matte, Depth=0.5mm, Features="Moisture Resistant", Height=0.016inch, Lead Free="Lead Free", Length=1mm, Military Standard=Not, Number of Terminations=2, Packaging="Tape and Reel", Pricing 1="1=0.10000, 10=0.01600, 100=0.00640, 1000=0.00289, 2500=0.00251, 5000=0.00207 (USD)", Resistance=464R, RoHS=Yes, Stock 1=10914, Supplier 1=Digi-Key, Termination=SMD/SMT, Voltage Rating (DC)=50V, Weight=2.3E-05oz, Width=0.02inch
R8 R11 R12: library part R-0402(1005), "Fixed Resistor, Metal Glaze/thick Film, 0.0625W, 10000ohm, 50V, 1% +/-Tol, 100ppm/Cel, Surface Mount, 0402", Case Code (Imperial)=0402, Case Code (Metric)=1005, Manufacturer=Yageo, Manufacturer Part Number=AC0402FR-0710KL, Max Operating Temperature=155°C, Max Power Dissipation=63mW, Min Operating Temperature=-55°C, Power Rating=62.5mW, Supplier Part Number 1=YAG3436CT-ND, Temperature Coefficient=100ppm/°C, Tolerance=1%, Voltage Rating=50V, Case/Package=0402, Category="Chip SMD Resistors", ComponentLink1Description=https://datasheet.ciiva.com:443/pdfs/VipMasterIC/IC/YAGO/YAGO-S-A0003597364/YAGO-S-A0003597364-1.pdf?src-supplier=IHS+Markit, ComponentLink1URL=https://datasheet.ciiva.com:443/pdfs/VipMasterIC/IC/YAGO/YAGO-S-A0003597364/YAGO-S-A0003597364-1.pdf?src-supplier=IHS+Markit, ComponentLink2Description=https://datasheet.ciiva.com/12656/pyu-ac-51-rohs-l-2-12656634.pdf?src-supplier=Mouser, ComponentLink2URL=https://datasheet.ciiva.com/12656/pyu-ac-51-rohs-l-2-12656634.pdf?src-supplier=Mouser, Composition="Thick Film", Depth=0.5mm, Features="Moisture Resistant,Automotive AEC-Q200", Height=0.015inch, Lead Free="Lead Free", Length=0.039inch, Military Standard=Not, Number of Terminations=2, Packaging="Tape and Reel", Pricing 1="1=0.10000, 10=0.02100, 100=0.00870, 1000=0.00390, 2500=0.00338, 5000=0.00279 (USD)", Resistance=10kR, RoHS=Yes, Stock 1=922338, Supplier 1=Digi-Key, Termination=SMD/SMT, Width=0.02inch
R13: library part R-0402(1005), "Fixed Resistor, Metal Glaze/thick Film, 0.0625W, 20000ohm, 50V, 1% +/-Tol, 100ppm/Cel, Surface Mount, 0402", Case Code (Imperial)=0402, Case Code (Metric)=1005, Manufacturer=Yageo, Manufacturer Part Number=AC0402FR-0720KL, Max Operating Temperature=155°C, Max Power Dissipation=63mW, Min Operating Temperature=-55°C, Power Rating=62.5mW, Supplier Part Number 1=YAG3454CT-ND, Temperature Coefficient=100ppm/°C, Tolerance=1%, Voltage Rating=50V, Case/Package=0402, Category="Chip SMD Resistors", ComponentLink1Description=https://datasheet.ciiva.com:443/pdfs/VipMasterIC/IC/YAGO/YAGO-S-A0003597364/YAGO-S-A0003597364-1.pdf?src-supplier=IHS+Markit, ComponentLink1URL=https://datasheet.ciiva.com:443/pdfs/VipMasterIC/IC/YAGO/YAGO-S-A0003597364/YAGO-S-A0003597364-1.pdf?src-supplier=IHS+Markit, ComponentLink2Description=http://www.mouser.com/ds/2/447/yageodocoutput-1111992.pdf?src-supplier=Mouser, ComponentLink2URL=http://www.mouser.com/ds/2/447/yageodocoutput-1111992.pdf?src-supplier=Mouser, ComponentLink3Description=http://www.yageo.com/NewPortal/yageodocoutput?fileName=/pdf/R-Chip/PYu-AC_51_RoHS_L_6.pdf&src-supplier=Digi-Key, ComponentLink3URL=http://www.yageo.com/NewPortal/yageodocoutput?fileName=/pdf/R-Chip/PYu-AC_51_RoHS_L_6.pdf&src-supplier=Digi-Key, Composition="Thick Film", Features="Moisture Resistant,Automotive AEC-Q200", Height=0.015inch, Length=0.039inch, Number of Terminations=2, Packaging="Tape and Reel", Pricing 1="1=0.10000, 10=0.02100, 100=0.00870, 1000=0.00390, 2500=0.00338, 5000=0.00279 (USD)", Resistance=20kR, RoHS=Yes, Supplier 1=Digi-Key, Termination=SMD/SMT, Width=0.02inch
R14: library part R-0402(1005), "Fixed Resistor, Metal Glaze/thick Film, 0.0625W, 2000ohm, 50V, 1% +/-Tol, 100ppm/Cel, Surface Mount, 0402", Case Code (Imperial)=0402, Case Code (Metric)=1005, Manufacturer=Yageo, Manufacturer Part Number=AC0402FR-072KL, Max Operating Temperature=155°C, Max Power Dissipation=63mW, Min Operating Temperature=-55°C, Power Rating=62.5mW, Supplier Part Number 1=YAG3470CT-ND, Temperature Coefficient=100ppm/°C, Tolerance=1%, Voltage Rating=50V, Case/Package=0402, Category="Chip SMD Resistors", ComponentLink1Description=https://datasheet.ciiva.com:443/pdfs/VipMasterIC/IC/YAGO/YAGO-S-A0003597364/YAGO-S-A0003597364-1.pdf?src-supplier=IHS+Markit, ComponentLink1URL=https://datasheet.ciiva.com:443/pdfs/VipMasterIC/IC/YAGO/YAGO-S-A0003597364/YAGO-S-A0003597364-1.pdf?src-supplier=IHS+Markit, ComponentLink2Description=https://datasheet.ciiva.com/12576/pyu-ac-51-rohs-l-2-12576349.pdf?src-supplier=Mouser, ComponentLink2URL=https://datasheet.ciiva.com/12576/pyu-ac-51-rohs-l-2-12576349.pdf?src-supplier=Mouser, Composition="Thick Film", Features="Moisture Resistant,Automotive AEC-Q200", Height=0.015inch, Lead Free="Lead Free", Length=0.039inch, Number of Terminations=2, Packaging="Tape and Reel", Pricing 1="1=0.10000, 10=0.02100, 100=0.00870, 1000=0.00390, 2500=0.00338, 5000=0.00279 (USD)", Resistance=2kR, RoHS=Yes, Stock 1=172746, Supplier 1=Digi-Key, Termination=SMD/SMT, Weight=2.3E-05oz, Width=0.02inch
R15 R18: library part R-0402(1005), "Fixed Resistor, Metal Glaze/thick Film, 0.0625W, 1000000ohm, 50V, 1% +/-Tol, 100ppm/Cel, Surface Mount, 0402", Case Code (Imperial)=0402, Case Code (Metric)=1005, Manufacturer=Yageo, Manufacturer Part Number=AC0402FR-071ML, Max Operating Temperature=155°C, Max Power Dissipation=63mW, Min Operating Temperature=-55°C, Power Rating=62.5mW, Resistor Type="Thick Film", Supplier Part Number 1=YAG3450CT-ND, Temperature Coefficient=100ppm/°C, Tolerance=1%, Voltage Rating=50V, Case/Package=0402, Category="Chip SMD Resistors", ComponentLink1Description=https://datasheet.ciiva.com:443/pdfs/VipMasterIC/IC/YAGO/YAGO-S-A0003597364/YAGO-S-A0003597364-1.pdf?src-supplier=IHS+Markit, ComponentLink1URL=https://datasheet.ciiva.com:443/pdfs/VipMasterIC/IC/YAGO/YAGO-S-A0003597364/YAGO-S-A0003597364-1.pdf?src-supplier=IHS+Markit, ComponentLink2Description=http://components.arrow.com/part/dataview/0323_03348700?src-supplier=Arrow+Europe, ComponentLink2URL=http://components.arrow.com/part/dataview/0323_03348700?src-supplier=Arrow+Europe, ComponentLink3Description=http://www.yageo.com/documents/recent/PYu-AC_51_RoHS_L_2.pdf?src-supplier=Mouser, ComponentLink3URL=http://www.yageo.com/documents/recent/PYu-AC_51_RoHS_L_2.pdf?src-supplier=Mouser, ComponentLink4Description=http://www.yageo.com/NewPortal/yageodocoutput?fileName=/pdf/R-Chip/PYu-AC_51_RoHS_L_6.pdf&src-supplier=Digi-Key, ComponentLink4URL=http://www.yageo.com/NewPortal/yageodocoutput?fileName=/pdf/R-Chip/PYu-AC_51_RoHS_L_6.pdf&src-supplier=Digi-Key, ComponentLink5Description=http://www.yageo.com/documents/recent/PYu-AC_51_RoHS_L_2_revised.pdf?src-supplier=Future+Electronics, ComponentLink5URL=http://www.yageo.com/documents/recent/PYu-AC_51_RoHS_L_2_revised.pdf?src-supplier=Future+Electronics, Depth=0.5mm, Features="Moisture Resistant,Automotive AEC-Q200", Height=0.015inch, Lead Free="Lead Free", Length=1mm, Military Standard=Not, Number of Terminations=2, Packaging="Tape and Reel", Pricing 1="1=0.10000, 10=0.01900, 100=0.00780, 1000=0.00352, 2500=0.00306, 5000=0.00253 (USD)", Resistance=1MR, RoHS=Yes, Stock 1=25026, Supplier 1=Digi-Key, Termination=SMD/SMT, Width=0.5mm